# Altium PCB S bus (5.775 X 3.30 inches).PCBDOC
Units mil, origin at the board's own origin, x right, y up, seen from the top; angles counter-clockwise.
Board outline 5775 x 3300 mil, 10 copper layers (TopLayer, MidLayer1, MidLayer2, MidLayer3, MidLayer4, MidLayer5, MidLayer6, MidLayer7, MidLayer8, BottomLayer); 1 components, 0 nets, 99 pads, 0 vias.
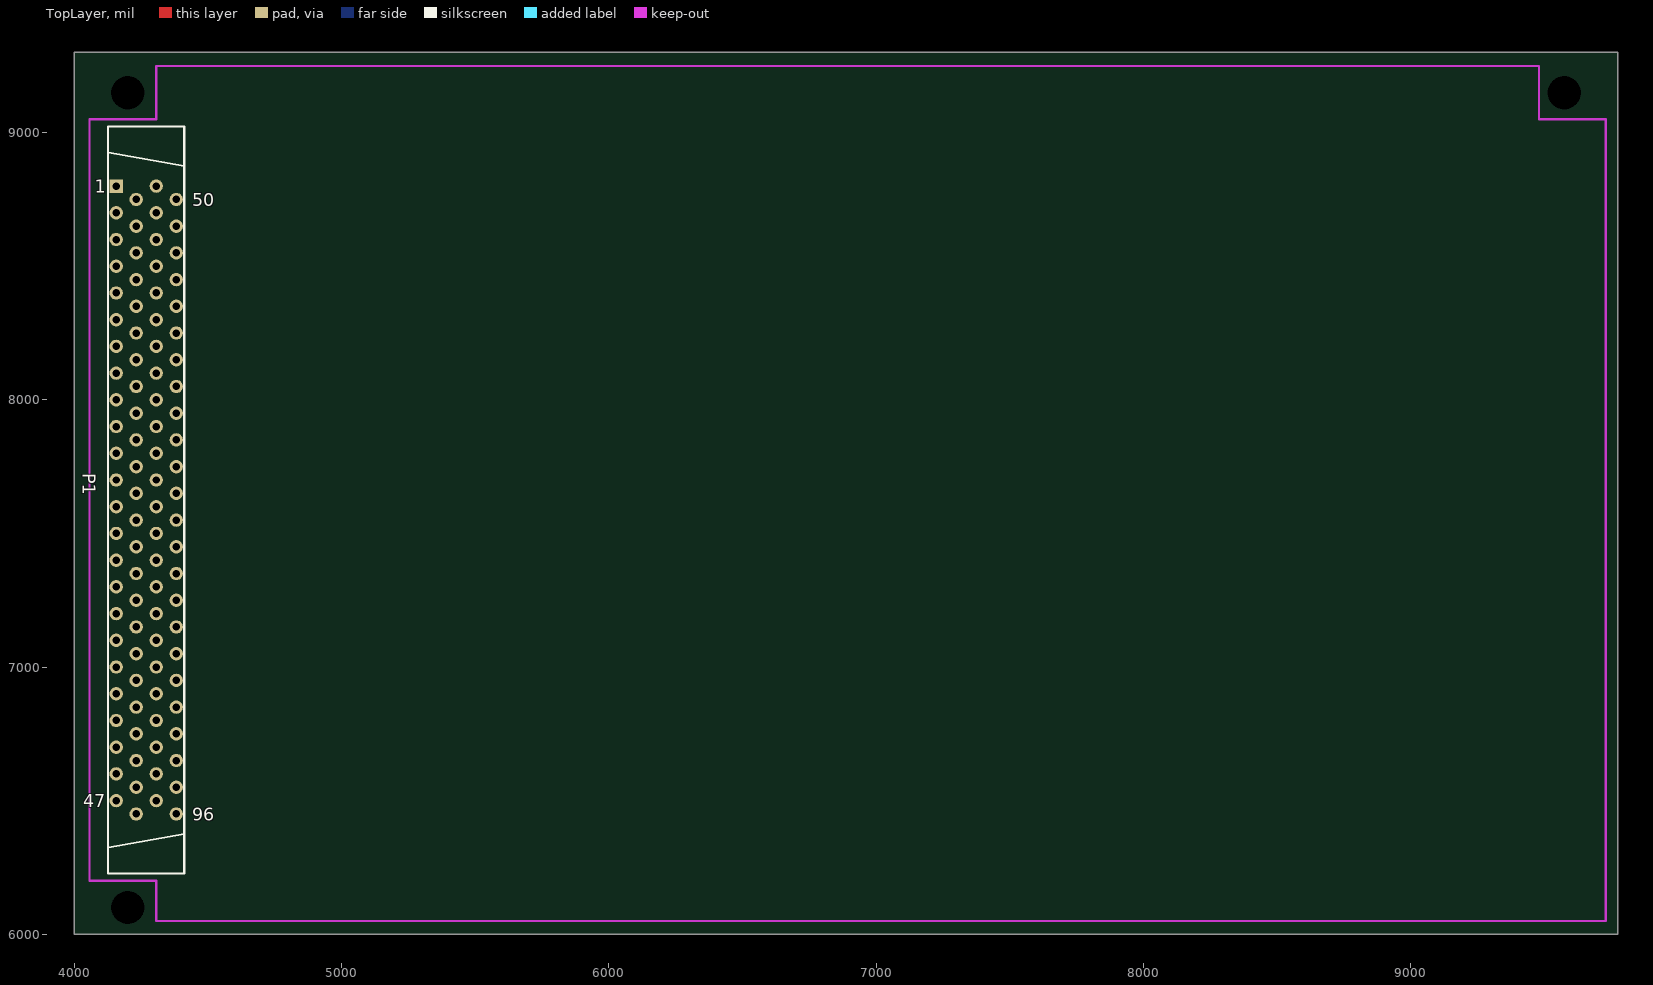
[diagram p0: TopLayer view]
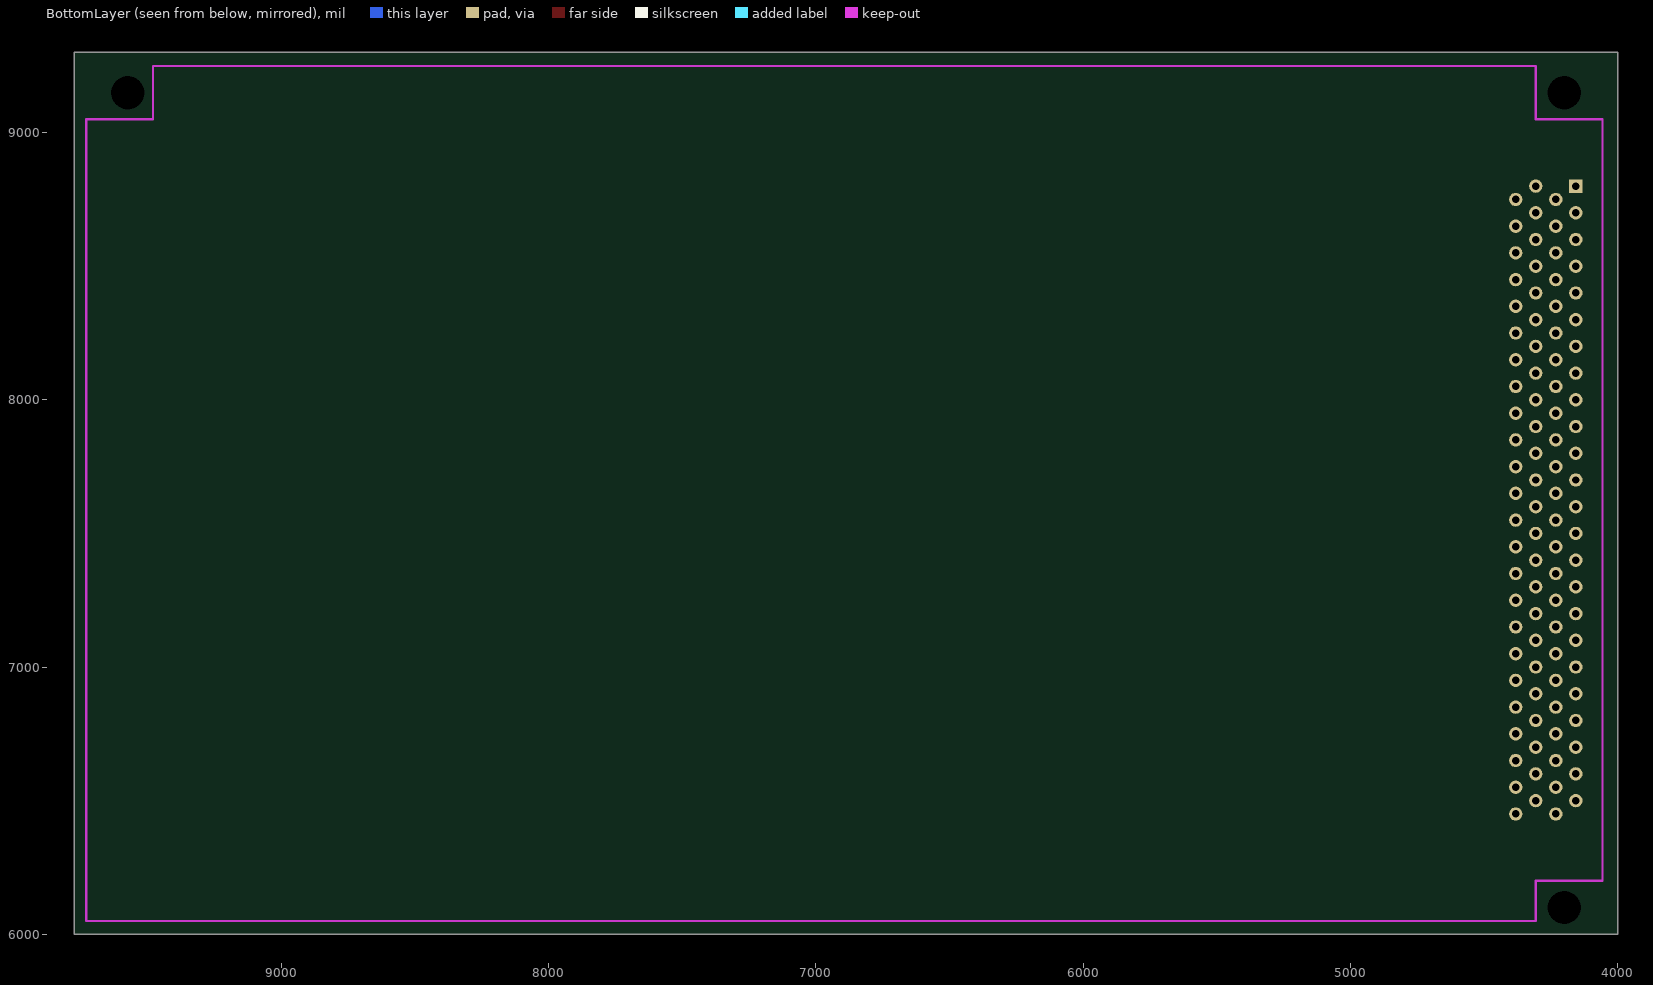
[diagram p1: BottomLayer view, seen from below]
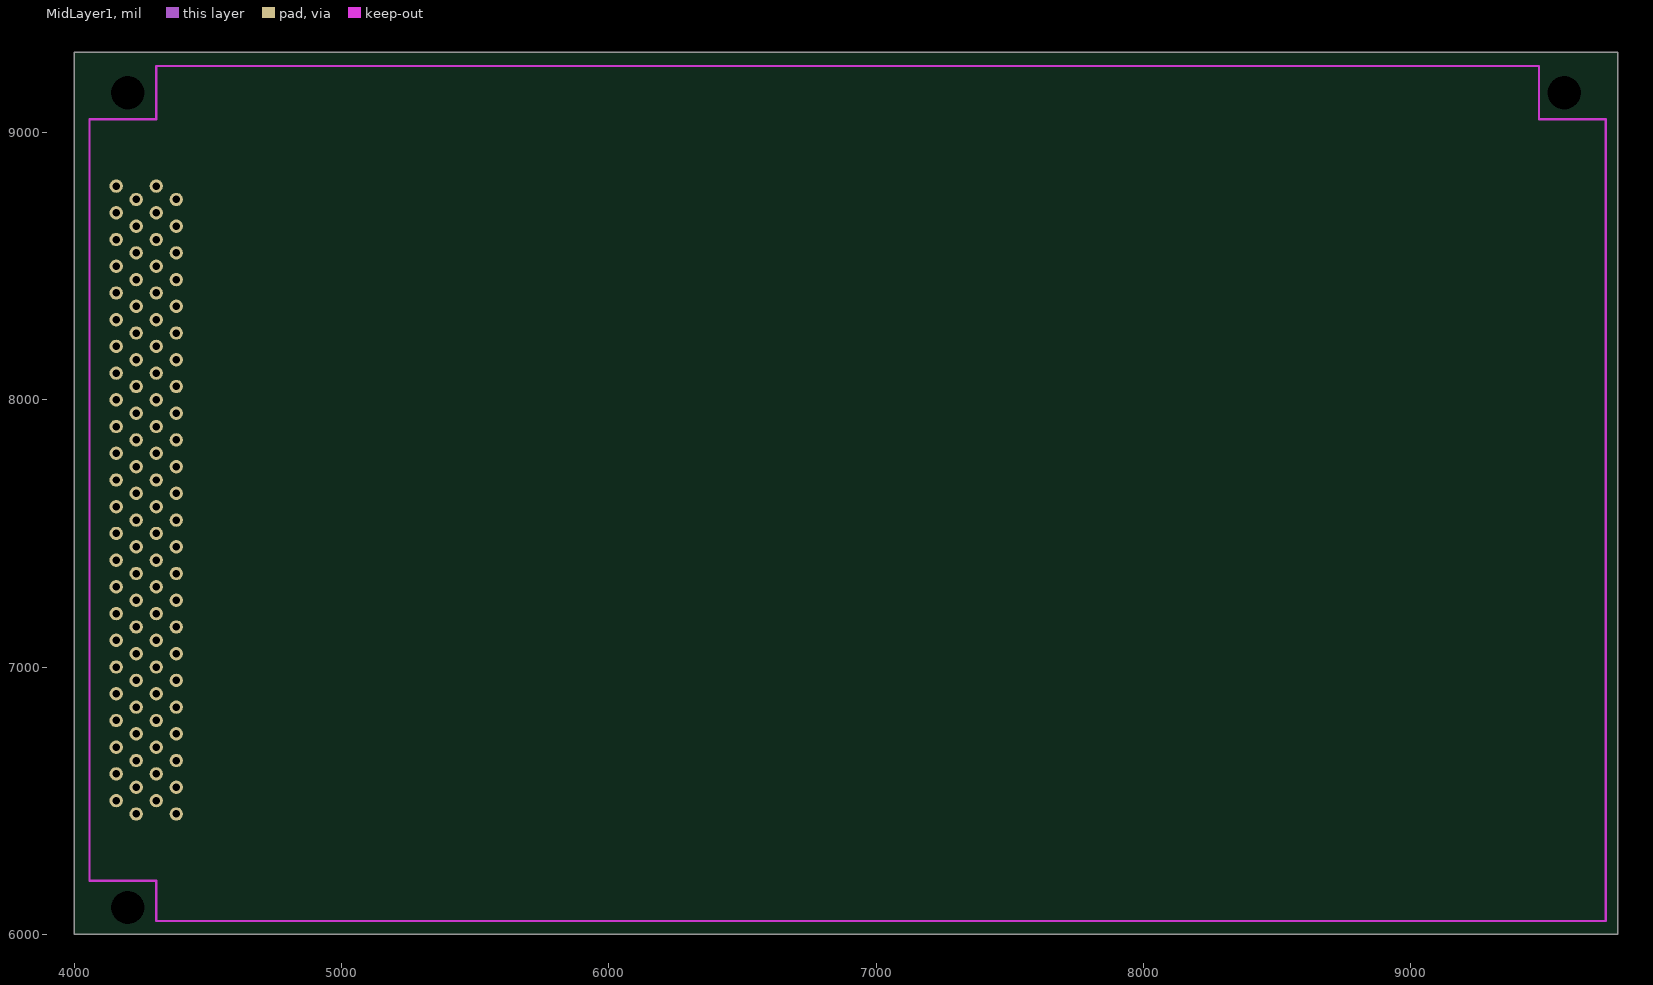
[diagram p2: MidLayer1]
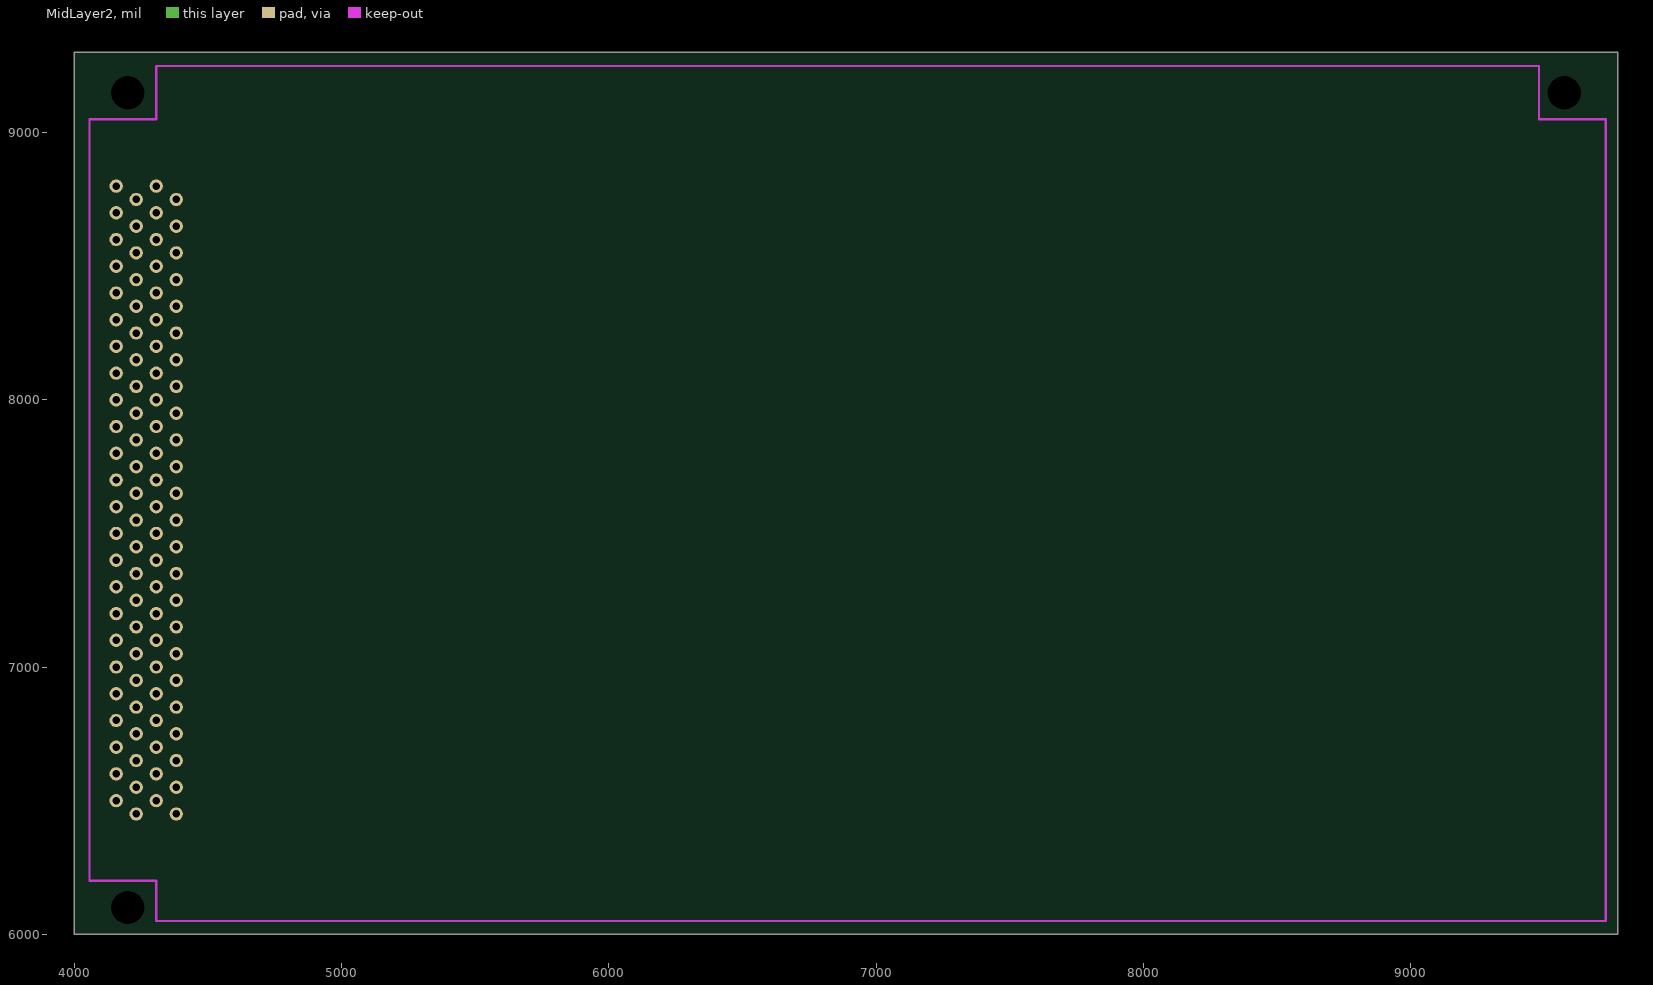
[diagram p3: MidLayer2]
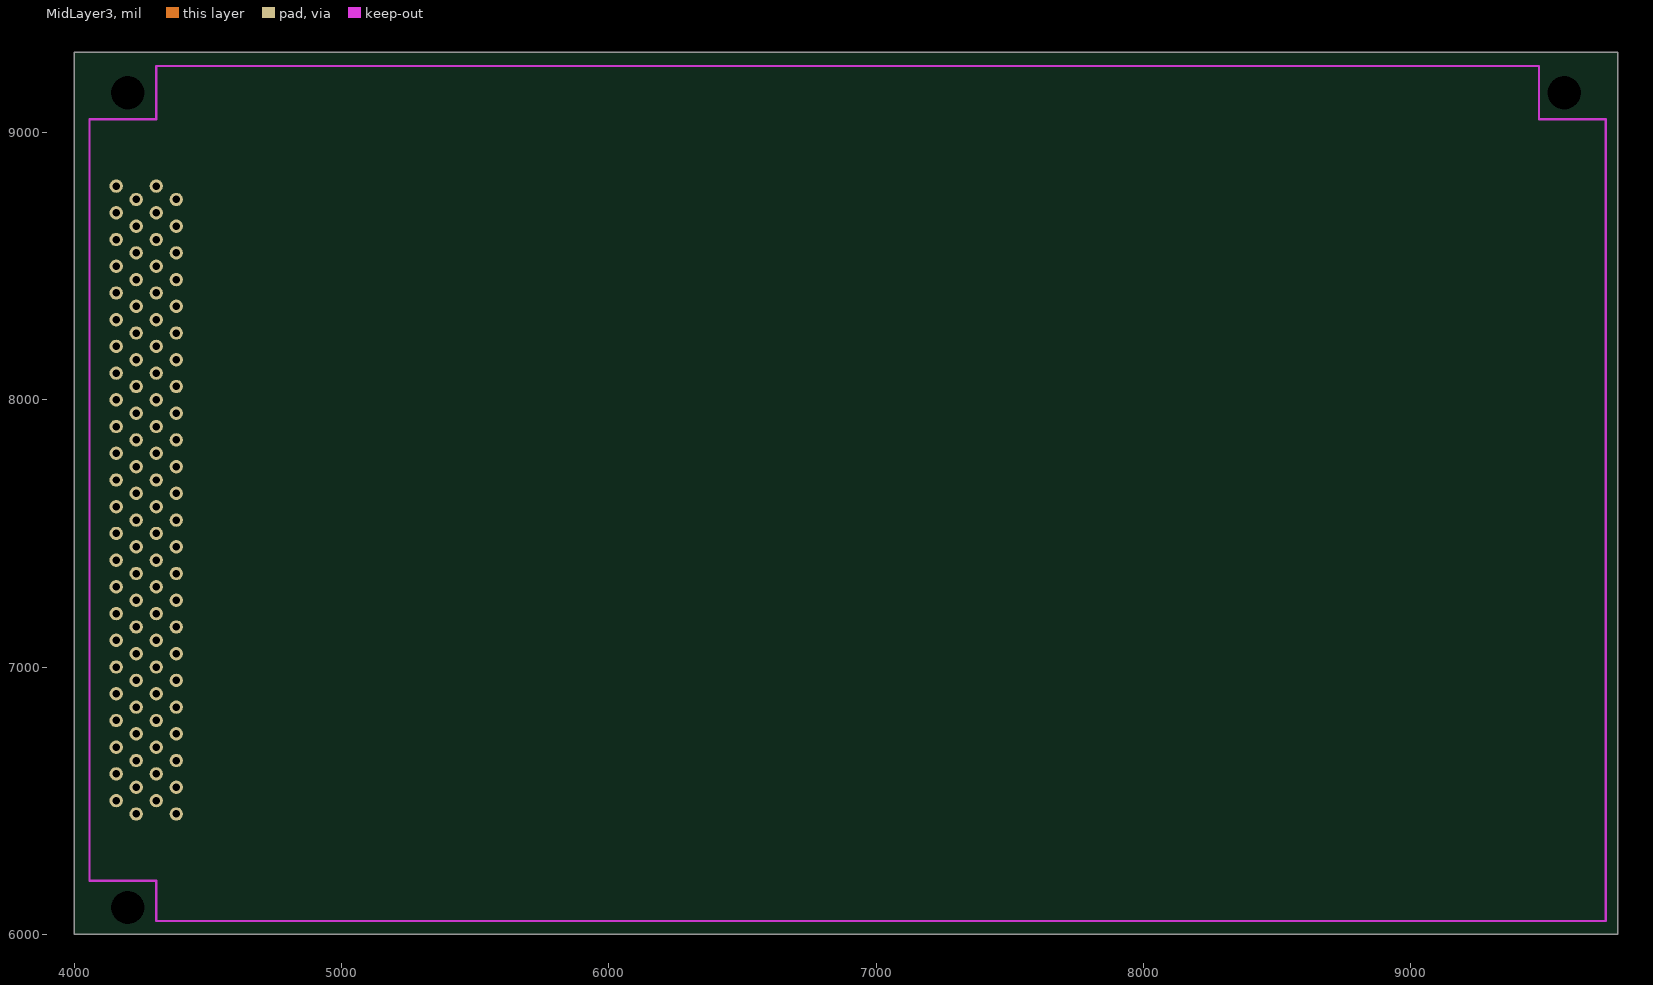
[diagram p4: MidLayer3]
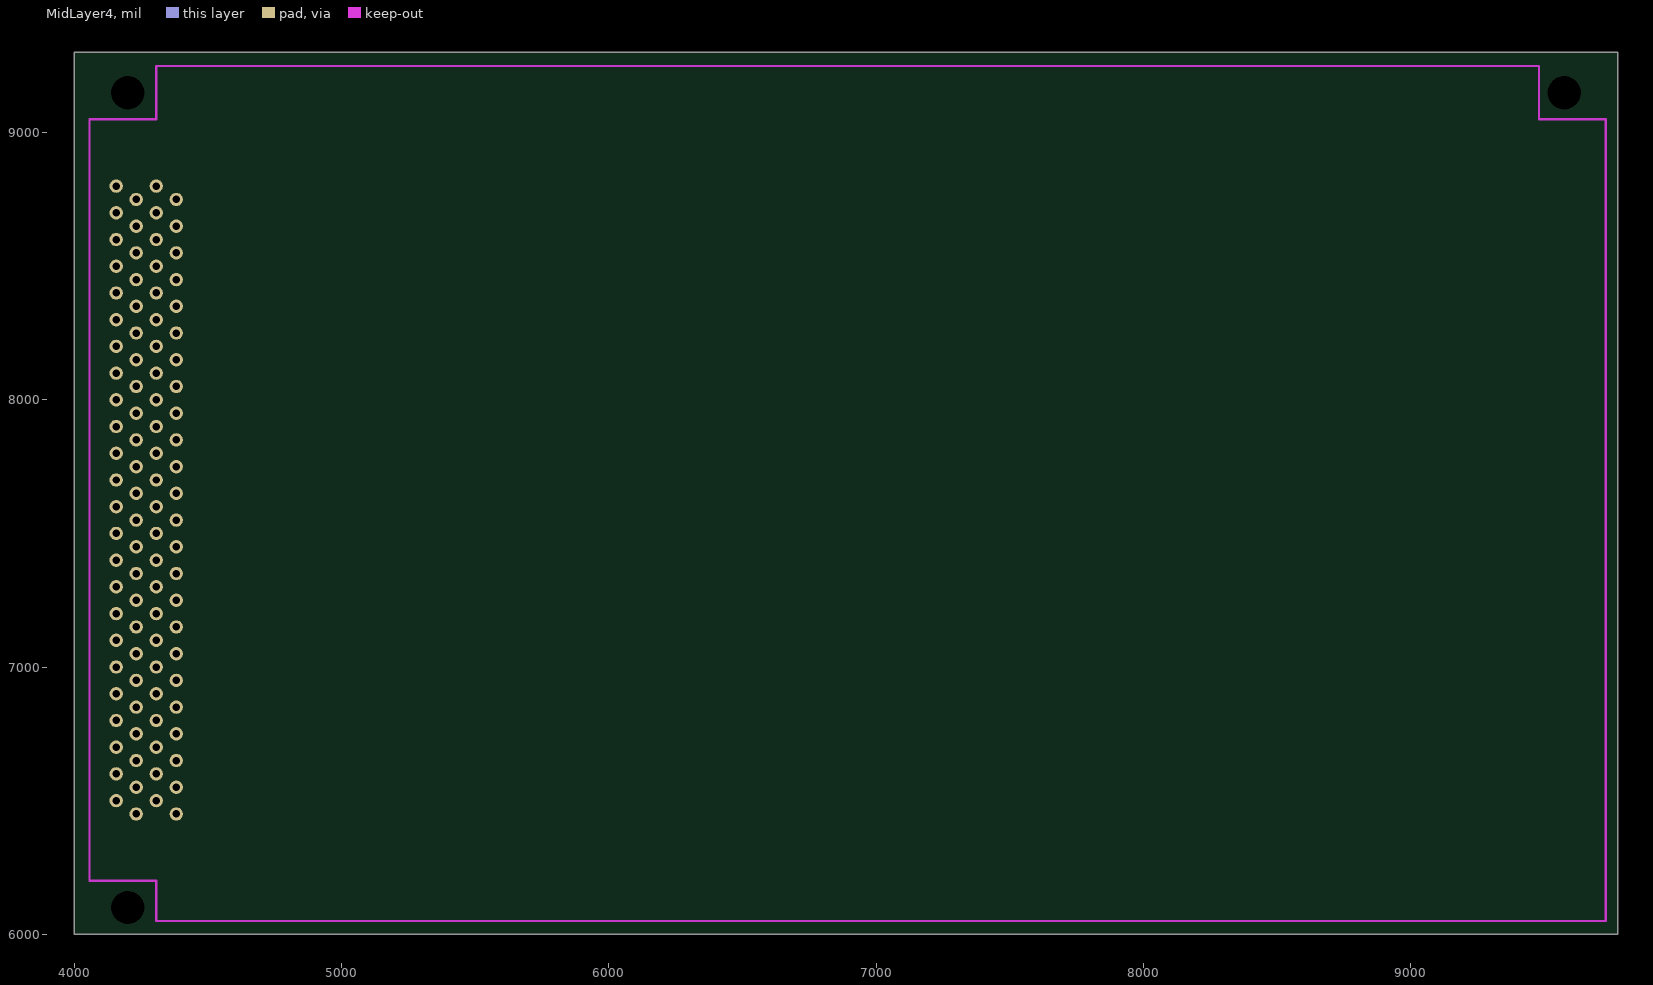
[diagram p5: MidLayer4]
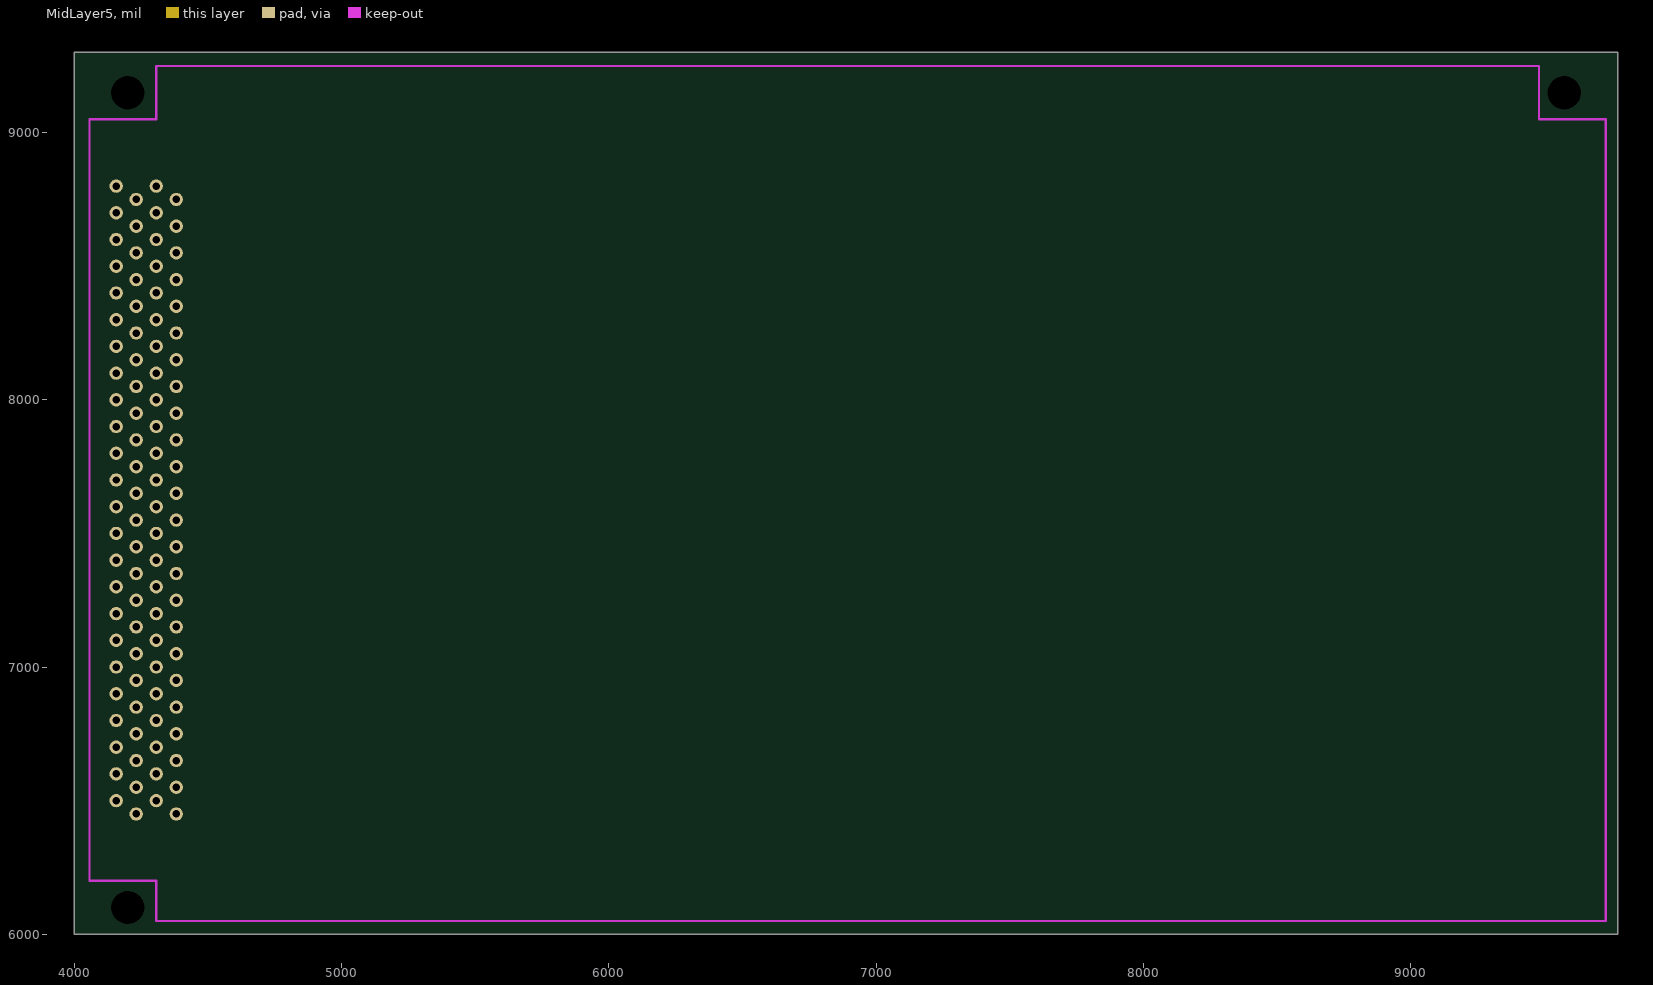
[diagram p6: MidLayer5]
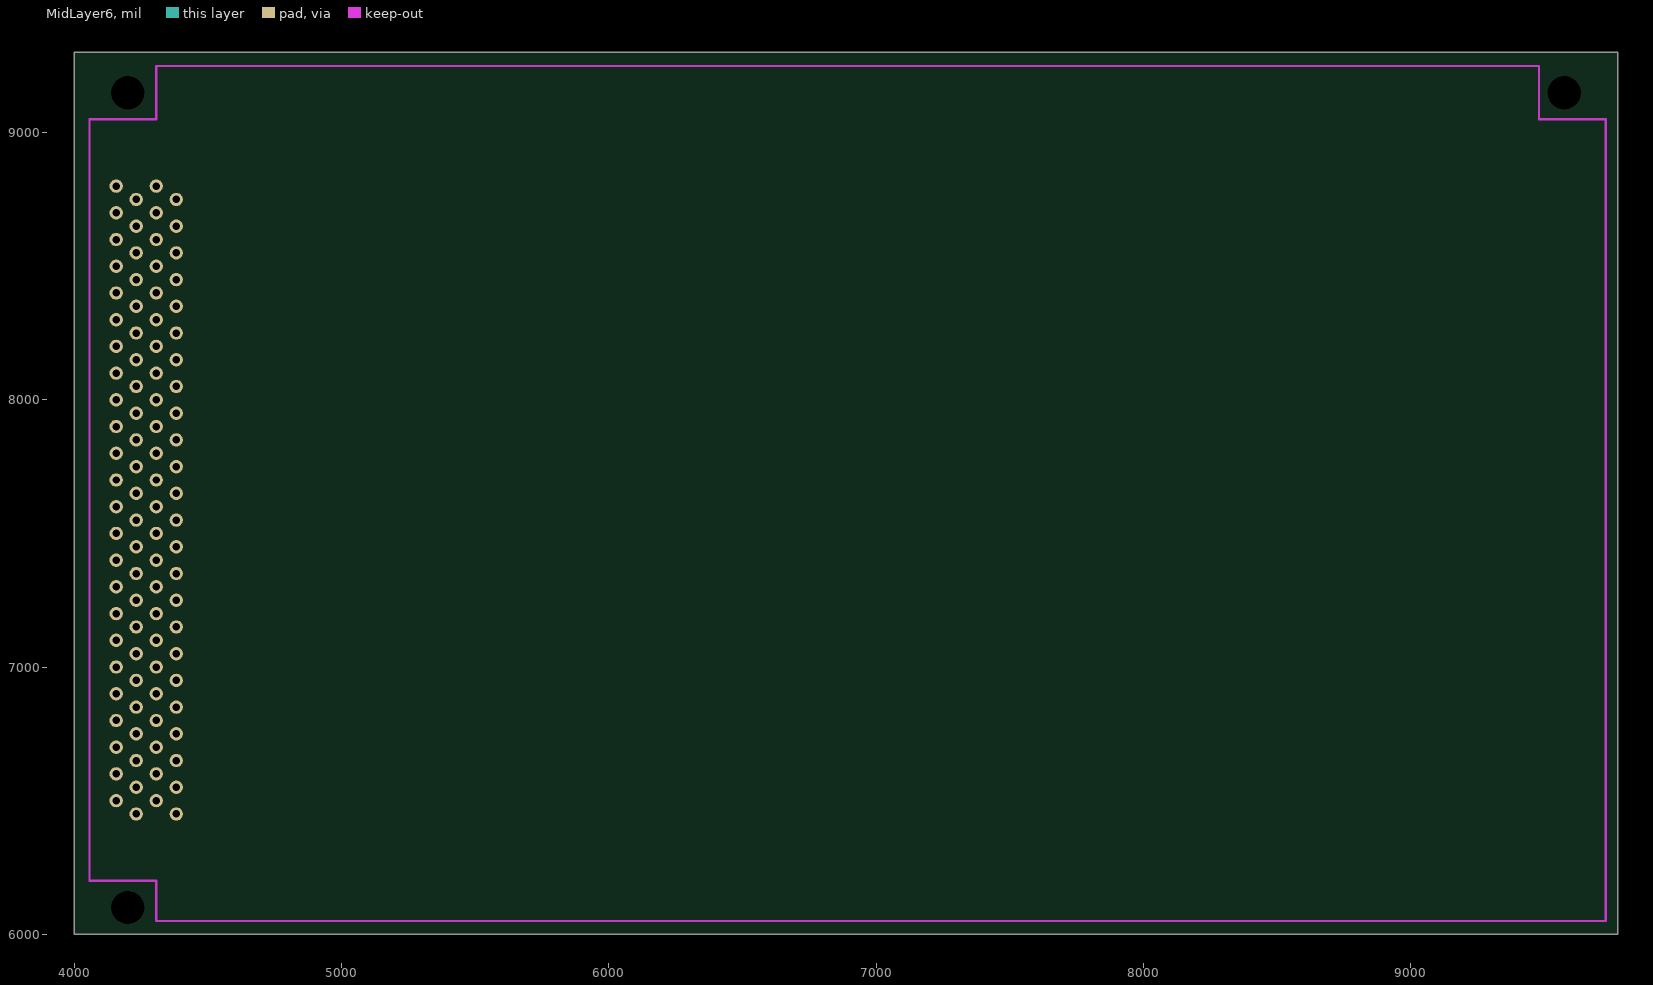
[diagram p7: MidLayer6]
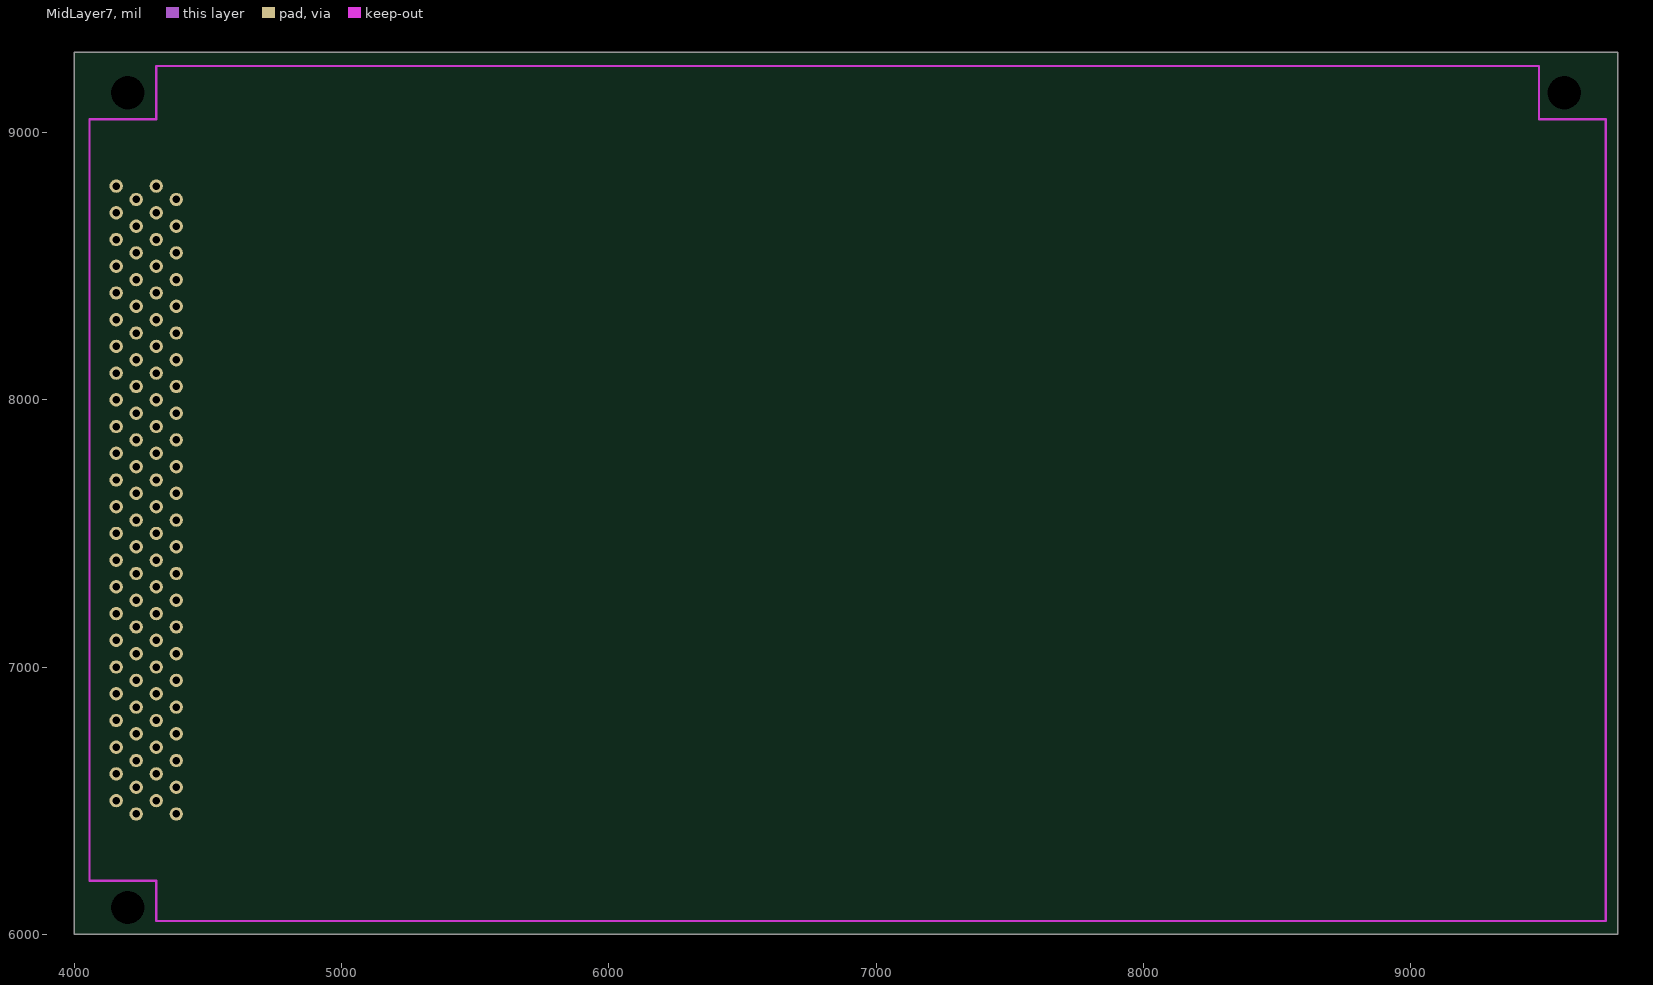
[diagram p8: MidLayer7]
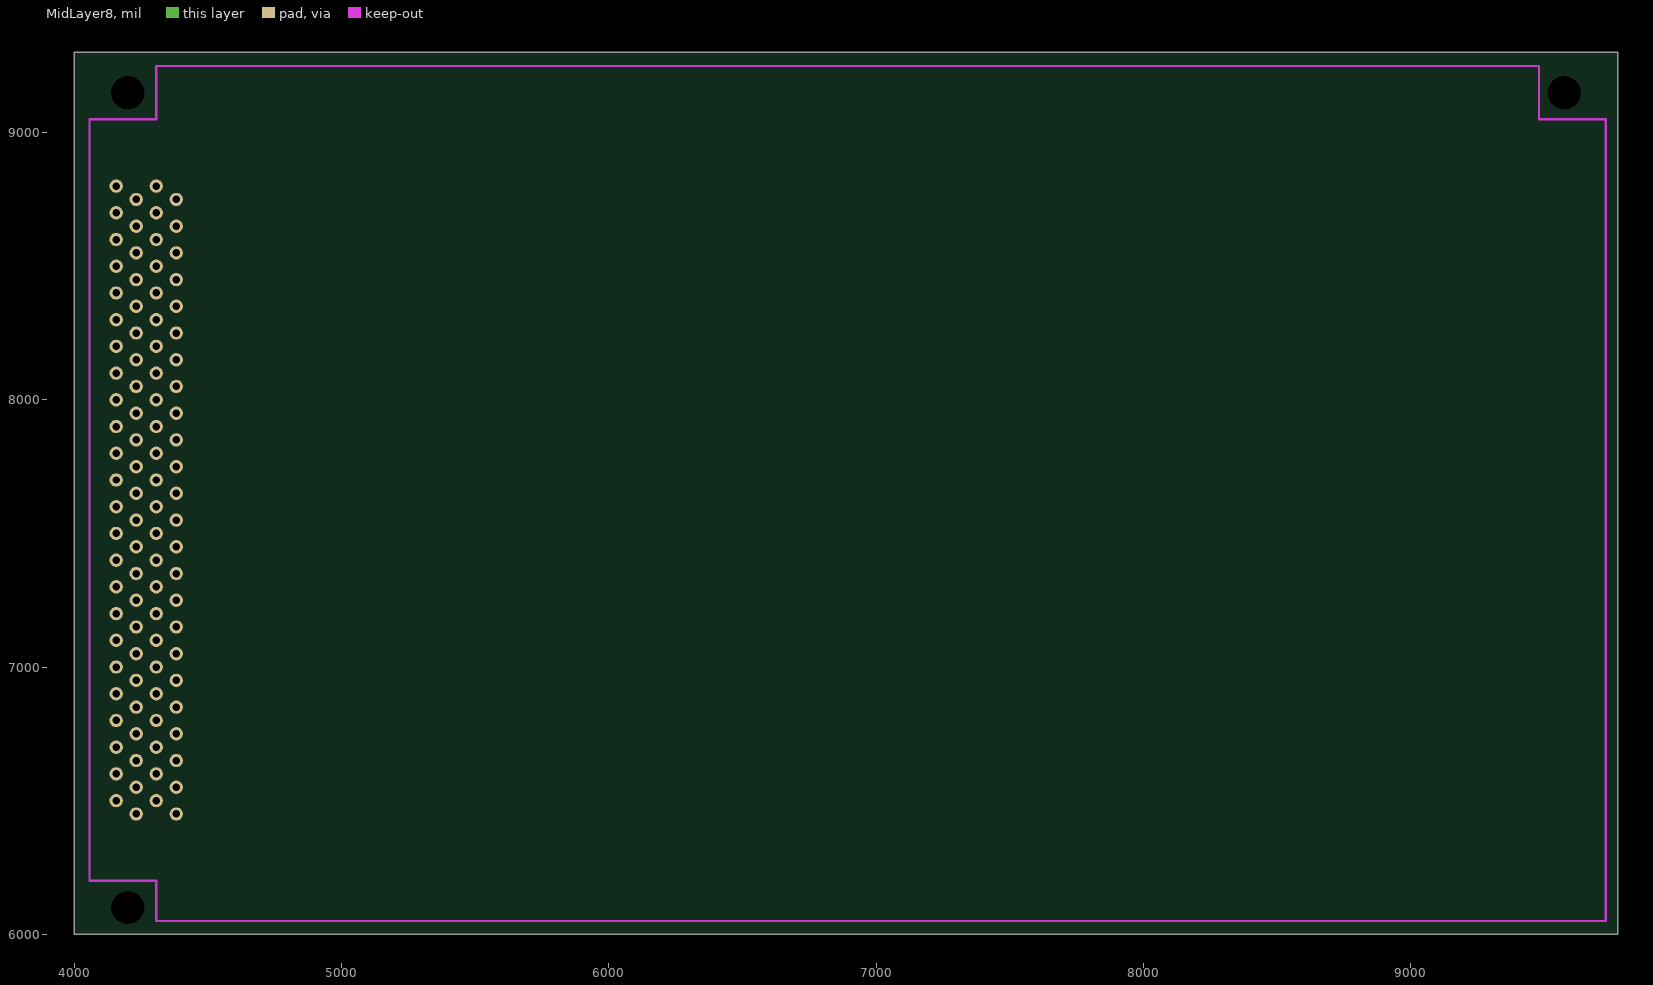
[diagram p9: MidLayer8]

## Layer stack, top to bottom
TopSolder: solder mask 0.4, Solder Resist, Dk 3.5
TopLayer: signal copper 1.4
Dielectric1: core 12.6, FR-4, Dk 4.8
MidLayer1: signal copper 1.4
Dielectric2: prepreg 12.6, FR-4, Dk 4.8
MidLayer2: signal copper 1.4
Dielectric3: core 12.6, FR-4, Dk 4.8
MidLayer3: signal copper 1.4
Dielectric4: prepreg 12.6, FR-4, Dk 4.8
MidLayer4: signal copper 1.4
Dielectric5: core 12.6, FR-4, Dk 4.8
MidLayer5: signal copper 1.4
Dielectric6: prepreg 12.6, FR-4, Dk 4.8
MidLayer6: signal copper 1.4
Dielectric7: core 12.6, FR-4, Dk 4.8
MidLayer7: signal copper 1.4
Dielectric8: prepreg 12.6, FR-4, Dk 4.8
MidLayer8: signal copper 1.4
Dielectric9: core 12.6, FR-4, Dk 4.8
BottomLayer: signal copper 1.4
BottomSolder: solder mask 0.4, Solder Resist, Dk 3.5

## Board outline
4000,6000 9775,6000 9775,9300 4000,9300

## Design rules (kind name [scope] priority, off if disabled: settings)
Clearance [All] p1: gap=10
FabricationTestPointUsage TestPointUsage [All] p1: valid=0 allowmultiple=FALSE
FabricationTestpoint Testpoint [All] p1: side=3 testpointundercomponent=TRUE minsize=40 maxsize=100 preferedsize=60 minholesize=20 maxholesize=40 preferedholesize=32 testpointgrid=1 allowsidetop=TRUE allowsidebottom=TRUE usegrid=TRUE gridtolerance=0.01
PlaneClearance [All] p1: clearance=10
PolygonConnect [All] p1: connectstyle=Relief reliefconductorwidth=10 reliefentries=4 polygonreliefangle="90 Angle" airgapwidth=10
RoutingVias [All] p1: holewidth=28 width=50 viastyle="Through Hole" minholewidth=28 minwidth=50 maxholewidth=28 maxwidth=50
SilkToSolderMaskClearance SilkscreenOverComponentPads [IsPad] p1: minsilkscreentomaskgap=10 clearancetoexposedcopper=TRUE
SolderMaskExpansion [All] p1: expansion=2
Width [All] p1: maxlimit=10 minlimit=10 preferedwidth=10
26 further rules are at their usual default settings.

## Components (designator, comment, footprint, x,y, rotation, side; value= is the part's Value field where it differs from the comment)
P1 "SBUS96" SBUS96 4156,8800 r270 top locked

## Footprints (in the part's own frame and the unit in brackets; to place one, negate y for a bottom-side part, rotate by r counter-clockwise, add the part's x,y. Pads: shape width x height; smd on the part's side, far side on the other; paste and mask are expansions set on the pad)
SBUS96 [mil]
  rect 50x50 / inner round 50 / far side rect 50x50 hole 28: 1(0,0)
  round 50 hole 28: 2(50,75) 3(100,0) 4(150,75) 5(200,0) 6(250,75) 7(300,0) 8(350,75) 9(400,0) 10(450,75) 11(500,0) 12(550,75) 13(600,0) 14(650,75) 15(700,0) 16(750,75) 17(800,0) 18(850,75) 19(900,0) 20(950,75) 21(1000,0) 22(1050,75) 23(1100,0) 24(1150,75) 25(1200,0) 26(1250,75) 27(1300,0) 28(1350,75) 29(1400,0) 30(1450,75) 31(1500,0) 32(1550,75) 33(1600,0) 34(1650,75) 35(1700,0) 36(1750,75) 37(1800,0) 38(1850,75) 39(1900,0) 40(1950,75) 41(2000,0) 42(2050,75) 43(2100,0) 44(2150,75) 45(2200,0) 46(2250,75) 47(2300,0) 48(2350,75) 49(0,150) 50(50,225) 51(100,150) 52(150,225) 53(200,150) 54(250,225) 55(300,150) 56(350,225) 57(400,150) 58(450,225) 59(500,150) 60(550,225) 61(600,150) 62(650,225) 63(700,150) 64(750,225) 65(800,150) 66(850,225) 67(900,150) 68(950,225) 69(1000,150) 70(1050,225) 71(1100,150) 72(1150,225) 73(1200,150) 74(1250,225) 75(1300,150) 76(1350,225) 77(1400,150) 78(1450,225) 79(1500,150) 80(1550,225) 81(1600,150) 82(1650,225) 83(1700,150) 84(1750,225) 85(1800,150) 86(1850,225) 87(1900,150) 88(1950,225) 89(2000,150) 90(2050,225) 91(2100,150) 92(2150,225) 93(2200,150) 94(2250,225) 95(2300,150) 96(2350,225)
  silkscreen extent -223,-30 2573,255

## Free pads (board coordinates)
  round 50 hole 125: 1(9575,9150) 2(4200,9150) 3(4200,6100)

## Nets (pads, with @x,y where several pads share a name; then routed paths per layer and width w, separated by ;. In a path a pad name is that pad's centre, name@x,y a point inside that pad or via, vN(x,y) a via of type N, cw(c..) or ccw(c..) an arc to the next point about the centre after c; other vN are vias at no path point)
pads on no net: P1.1 P1.2 P1.3 P1.4 P1.5 P1.6 P1.7 P1.8 P1.9 P1.10 P1.11 P1.12 P1.13 P1.14 P1.15 P1.16 P1.17 P1.18 P1.19 P1.20 P1.21 P1.22 P1.23 P1.24 P1.25 P1.26 P1.27 P1.28 P1.29 P1.30 P1.31 P1.32 P1.33 P1.34 P1.35 P1.36 P1.37 P1.38 P1.39 P1.40 P1.41 P1.42 P1.43 P1.44 P1.45 P1.46 P1.47 P1.48 P1.49 P1.50 P1.51 P1.52 P1.53 P1.54 P1.55 P1.56 P1.57 P1.58 P1.59 P1.60 P1.61 P1.62 P1.63 P1.64 P1.65 P1.66 P1.67 P1.68 P1.69 P1.70 P1.71 P1.72 P1.73 P1.74 P1.75 P1.76 P1.77 P1.78 P1.79 P1.80 P1.81 P1.82 P1.83 P1.84 P1.85 P1.86 P1.87 P1.88 P1.89 P1.90 P1.91 P1.92 P1.93 P1.94 P1.95 P1.96

## Keep-outs
KeepOutLayer:
  lines w8: 4056,6200 4056,9050 4306,9050 4306,9250 9481,9250 9481,9050 9731,9050 9731,6050 4306,6050 4306,6200 4056,6200

## Other copper
TopLayer:
  text ".GTL" at 9476,9490 h90
MidLayer1:
  text ".G1" at 9476,9490 h90
MidLayer2:
  text ".G2" at 9476,9490 h90
MidLayer3:
  text ".G3" at 9476,9490 h90
MidLayer4:
  text ".G4" at 9476,9490 h90
MidLayer5:
  text ".G5" at 9476,9490 h90
MidLayer6:
  text ".G6" at 9476,9490 h90
MidLayer7:
  text ".G7" at 9476,9490 h90
MidLayer8:
  text ".G8" at 9476,9490 h90
BottomLayer:
  text "P/N XXXXXX-XXX REV A" at 5320,9500 h75
  text ".GBL" at 9476,9490 h90

## Silkscreen, mask and mechanical layers (free items; w line width, h text height)
TopOverlay:
  rectangle: 4281,9703 5031,9903
  rectangle: 4281,9993 5031,10193
  lines w10: 5392.59,10095.97 ccw(c5441,10135.5) 5392.71,10095.83
  text "C" at 5496,10098 h60
  text "2002 COMPANY NAME" at 5646,10098 h75
  text "S/N" at 4031,10050.5 h75
  text "BOARD NAME" at 5496,9923 h75
  text "ASSY NO.: XXXXXX" at 5496,9773 h75
  text "REV" at 4031,9753 h75
  text ".GTO" at 9476,9490 h90
  text "1" at 4075,8775 h48
  text "50" at 4441.67,8725 h48
  text "47" at 4033.33,6475 h48
  text "96" at 4441.67,6425 h48
TopPaste:
  text ".GTP" at 9476,9490 h90
BottomPaste:
  text ".GBP" at 9476,9490 h90
TopSolder:
  text ".GTS" at 9476,9490 h90
BottomSolder:
  text ".GBS" at 9476,9490 h90
Mechanical1:
  the board outline again, w20
Mechanical4:
  text ".Pcb_File_Name_No_Path" at 7576,9680 h90
  text ".Printout_Name" at 7576,9490 h90
DrillDrawing:
  text ".LEGEND" at 10010,6990 h90
  text "Drilling Details." at 10010,6790 h90

## Dimensions
3980,6100 to 4000,6000 on Mechanical4
4200,5980 to 4000,6000 on Mechanical4